# Altium PCB ADC_Breakout.PcbDoc
Units mil, origin at the board's own origin, x right, y up, seen from the top; angles counter-clockwise.
Board outline 482.28 x 423.23 mil, 2 copper layers (Top Layer, Bottom Layer); 2 components, 8 nets, 19 pads, 1 vias.
Unrouted connection lines stored in the file: 3.
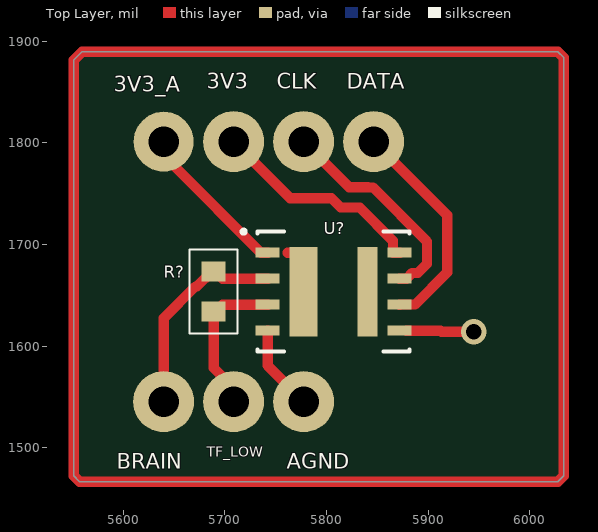
[diagram p0: Top Layer view]
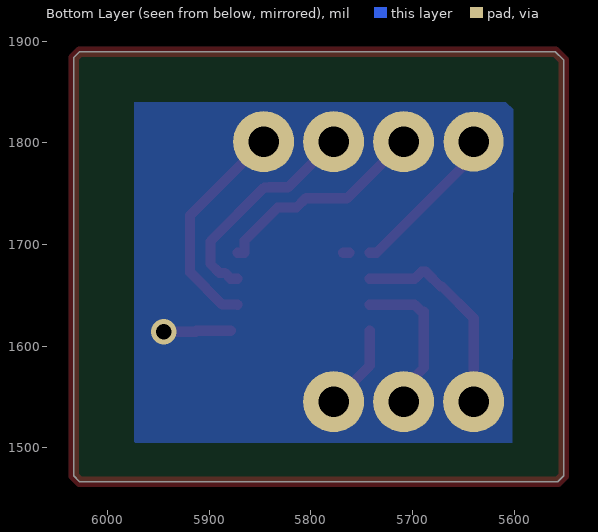
[diagram p1: Bottom Layer view, seen from below]

## Layer stack, top to bottom
Top Solder: solder mask 0.4, Solder Resist, Dk 3.5
Top Layer: signal copper 1.4
Dielectric 1: dielectric 12.6, FR-4, Dk 4.8
Bottom Layer: signal copper 1.4
Bottom Solder: solder mask 0.4, Solder Resist, Dk 3.5

## Board outline
5551.18,1472.39 5557.04,1466.54 6027.61,1466.54 6033.46,1472.39 6033.46,1883.91 6027.61,1889.76 5559.49,1889.76 5551.18,1881.46

## Design rules (kind name [scope] priority, off if disabled: settings)
Clearance [All] p1: gap=10 ignorepadtopadclearanceinfootprint=FALSE
PolygonConnect [All] p1: connectstyle=Relief reliefconductorwidth=10 reliefentries=4 polygonreliefangle="90 Angle" airgapwidth=10
RoutingVias [All] p1: holewidth=28 width=50 viastyle="Through Hole" minholewidth=28 minwidth=50 maxholewidth=28 maxwidth=50
SolderMaskExpansion [All] p1: expansion=4 istentingtop=FALSE
SupplyNets "Schematic Supply Nets_4" [InNet('AGND')] p1: voltage=0.000
SupplyNets "Schematic Supply Nets_3" [InNet('GND')] p2: voltage=0.000
SupplyNets "Schematic Supply Nets_2" [InNet('3V3')] p3: voltage=0.000
SupplyNets "Schematic Supply Nets_1" [InNet('3V3_A')] p4: voltage=0.000
Width [All] p1: maxlimit=10 minlimit=10 preferedwidth=10 minimp=50.000000 maximp=50.000000 favimp=50.000000
30 further rules are at their usual default settings.

## Components (designator, comment, footprint, x,y, rotation, side; value= is the part's Value field where it differs from the comment)
R? "Res1" 0402_Res 5688.98,1653.54 r270 top value=10
U? "ADC" SON65P350X100_HS-9N 5807.09,1653.54 r0 top

## Footprints (in the part's own frame and the unit in brackets; to place one, negate y for a bottom-side part, rotate by r counter-clockwise, add the part's x,y. Pads: shape width x height; smd on the part's side, far side on the other; paste and mask are expansions set on the pad)
0402_Res [mm]
  rect 0.5x0.6 smd: 1(-0.5,0) 2(0.5,0)
  silkscreen extent -1.05,-0.6 1.05,0.6
SON65P350X100_HS-9N [mm] "SON, 8-Leads, Body 2.70x3.50mm, Pitch 0.65mm, Thermal Pad 2.23x0.70mm, IPC Medium Density"
  rect 0.6x0.25 smd: 1(-1.65,0.975) 2(-1.65,0.325) 3(-1.65,-0.325) 4(-1.65,-0.975) 5(1.65,-0.975) 6(1.65,-0.325) 7(1.65,0.325) 8(1.65,0.975)
  rect 0.7x2.23 smd: 9(-0.75,0)
  rect 0.5x2.23 smd: 10(0.85,0)
  silkscreen extent -2.3,-1.5 1.9,1.55, body extent -1.8,-1.4 1.8,1.4, height 1

## Part data
R?: "Resistor", LatestRevisionDate=17-Jul-2002, LatestRevisionNote="Re-released for DXP Platform.", PackageDescription="Axial Device, Thru-Hole; 2 Leads; 0.3 in Pin Spacing", PackageReference=AXIAL-0.3, Published=8-Jun-2000, Publisher="Altium Limited"
U?: Supplier Part Number 1=296-AMC0106M05DENRCT-ND, Supplier 1=DigiKey

## Free pads (board coordinates)
  round 60 hole 30: 2(5777.56,1801.18) 2(5846.46,1801.18) 3(5708.66,1801.18) 5(5639.76,1545.28) 6(5708.66,1545.28) 7(5777.56,1545.28)
  round 59 hole 30: 4(5639.76,1801.18)

## Via types
v1: diameter 25, hole 15, Top Layer to Bottom Layer, 1 vias

## Nets (pads, with @x,y where several pads share a name; then routed paths per layer and width w, separated by ;. In a path a pad name is that pad's centre, name@x,y a point inside that pad or via, vN(x,y) a via of type N, cw(c..) or ccw(c..) an arc to the next point about the centre after c; other vN are vias at no path point)
3V3: pad.3 U?.8 | length 215.5
  Top Layer w10: pad.3 5764.28,1745.57 5804.89,1745.57 5814.11,1736.34 5832.7,1736.34 5865.39,1703.65 5865.39,1692.01 5865.47,1691.93 U?.8
3V3_A: pad.4 U?.1 | length 162.3
  Top Layer w10: pad.4 5649.14,1791.81 5649.14,1778.18 5735.39,1691.93 U?.1 ; 5761.81,1691.93 5768.39,1691.93 5768.46,1692.01
ADC_CLK: pad.2@5777.56,1801.18 U?.7 | length 217
  Top Layer w10: pad.2@5777.56,1801.18 5822.4,1756.34 5840.99,1756.34 5841.15,1756.18 5845.74,1756.18 5898.86,1703.06 5898.86,1680.79 5890.07,1672.01 5884.45,1672.01 5878.78,1666.34 U?.7
ADC_DATA: pad.2@5846.46,1801.18 U?.6 | length 218.6
  Top Layer w10: pad.2@5846.46,1801.18 5918.86,1728.78 5918.86,1672.51 5887.17,1640.83 5872.13,1640.83 U?.6
AGND: pad.7 U?.4 U?.9 | length 84.6
  Top Layer w10: U?.4 5742.13,1580.71 pad.7
FROM_BRAIN: pad.5 R?.1 U?.2 | length 204.4
  Top Layer w10: pad.5 5639.76,1627.51 5670.95,1658.7 5672.48,1658.7 5687.01,1673.23 R?.1 ; R?.1@5690.94,1673.23 5697.83,1666.34 U?.2
GND: U?.5 U?.10 | length 66.4
  Top Layer w10: U?.5@5878.86,1615.16 5912.38,1615.16 5913.37,1614.17 v1(5944.88,1614.17)
TF_LOW: pad.6 R?.2 U?.3 | length 150.8
  Top Layer w10: R?.2 5688.98,1578.49 5708.66,1558.81 pad.6 ; R?.2@5690.94,1633.86 5697.83,1640.75 U?.3
copper on no net: | length 1795.9
  Top Layer w10: 5551.18,1472.39 5557.04,1466.54 6027.61,1466.54 6033.46,1472.39 6033.46,1883.91 6027.61,1889.76 5596.41,1889.76 5559.49,1889.76 5551.18,1881.46 5551.18,1844.54 5551.18,1472.39

## Polygon pours and split planes (outlines as drawn)
GND on Bottom Layer "GND_L02_P000" (solid, pour order 0): 5601,1840 5974,1840 5974,1506 5973,1505 5602,1505

## Silkscreen, mask and mechanical layers (free items; w line width, h text height)
Top Overlay:
  text "3V3" at 5682.13,1853.39 h15
  text "CLK" at 5751.03,1853.39 h15
  text "DATA" at 5819.93,1853.39 h15
  text "3V3_A" at 5590.55,1850.39 h15
  text "TF_LOW" at 5682.13,1490.89 h10
  text "BRAIN" at 5593.55,1479.38 h15
  text "AGND" at 5760.87,1479.38 h15